# Altium PCB imu.PcbDoc
Units mil, origin at the board's own origin, x right, y up, seen from the top; angles counter-clockwise.
Board outline 1417.32 x 1417.32 mil, 2 copper layers (Top Layer, Bottom Layer); 52 components, 44 nets, 245 pads, 84 vias.
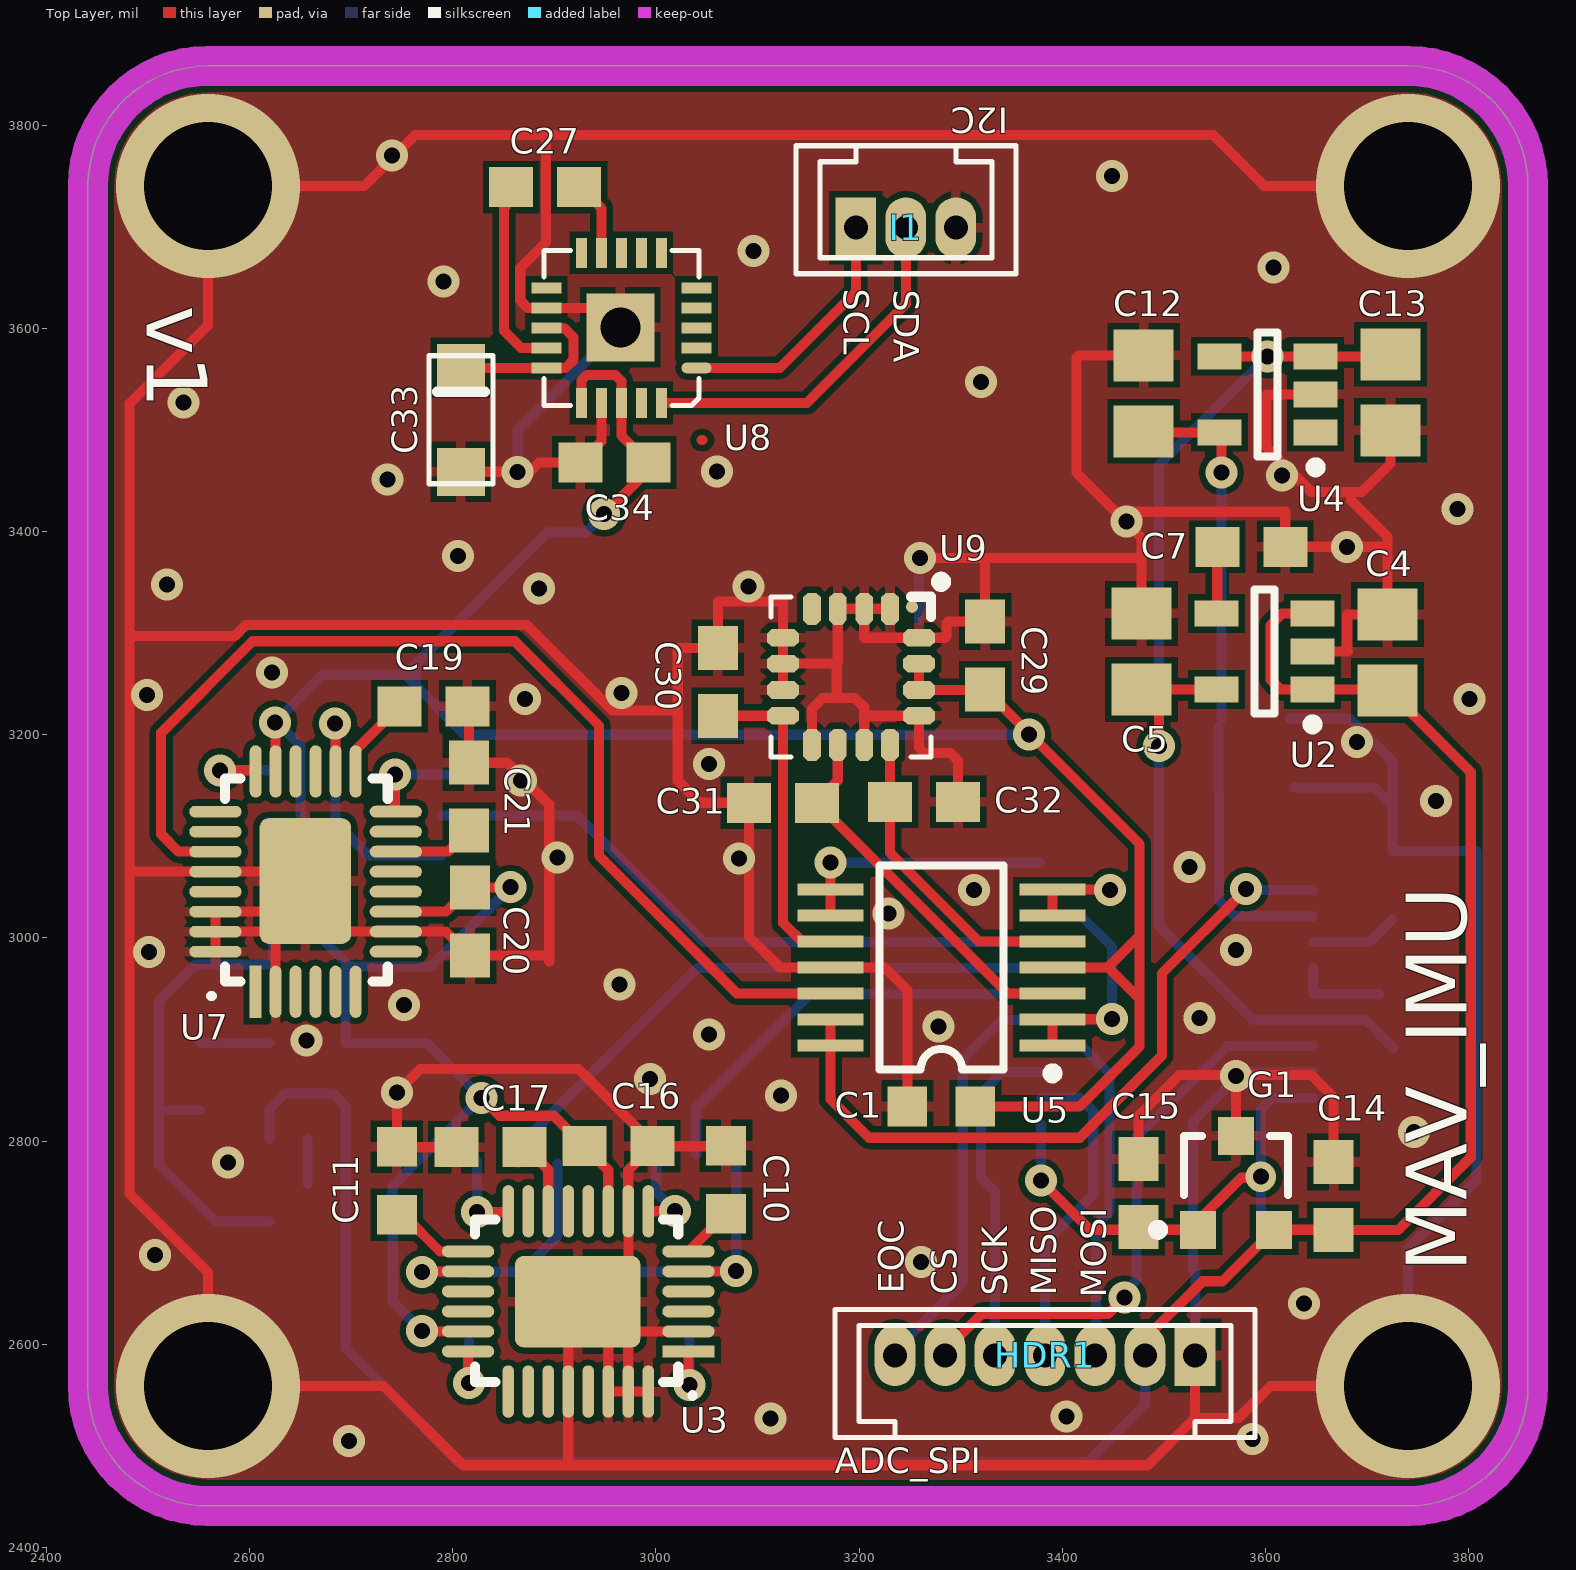
[diagram p0: Top Layer view]
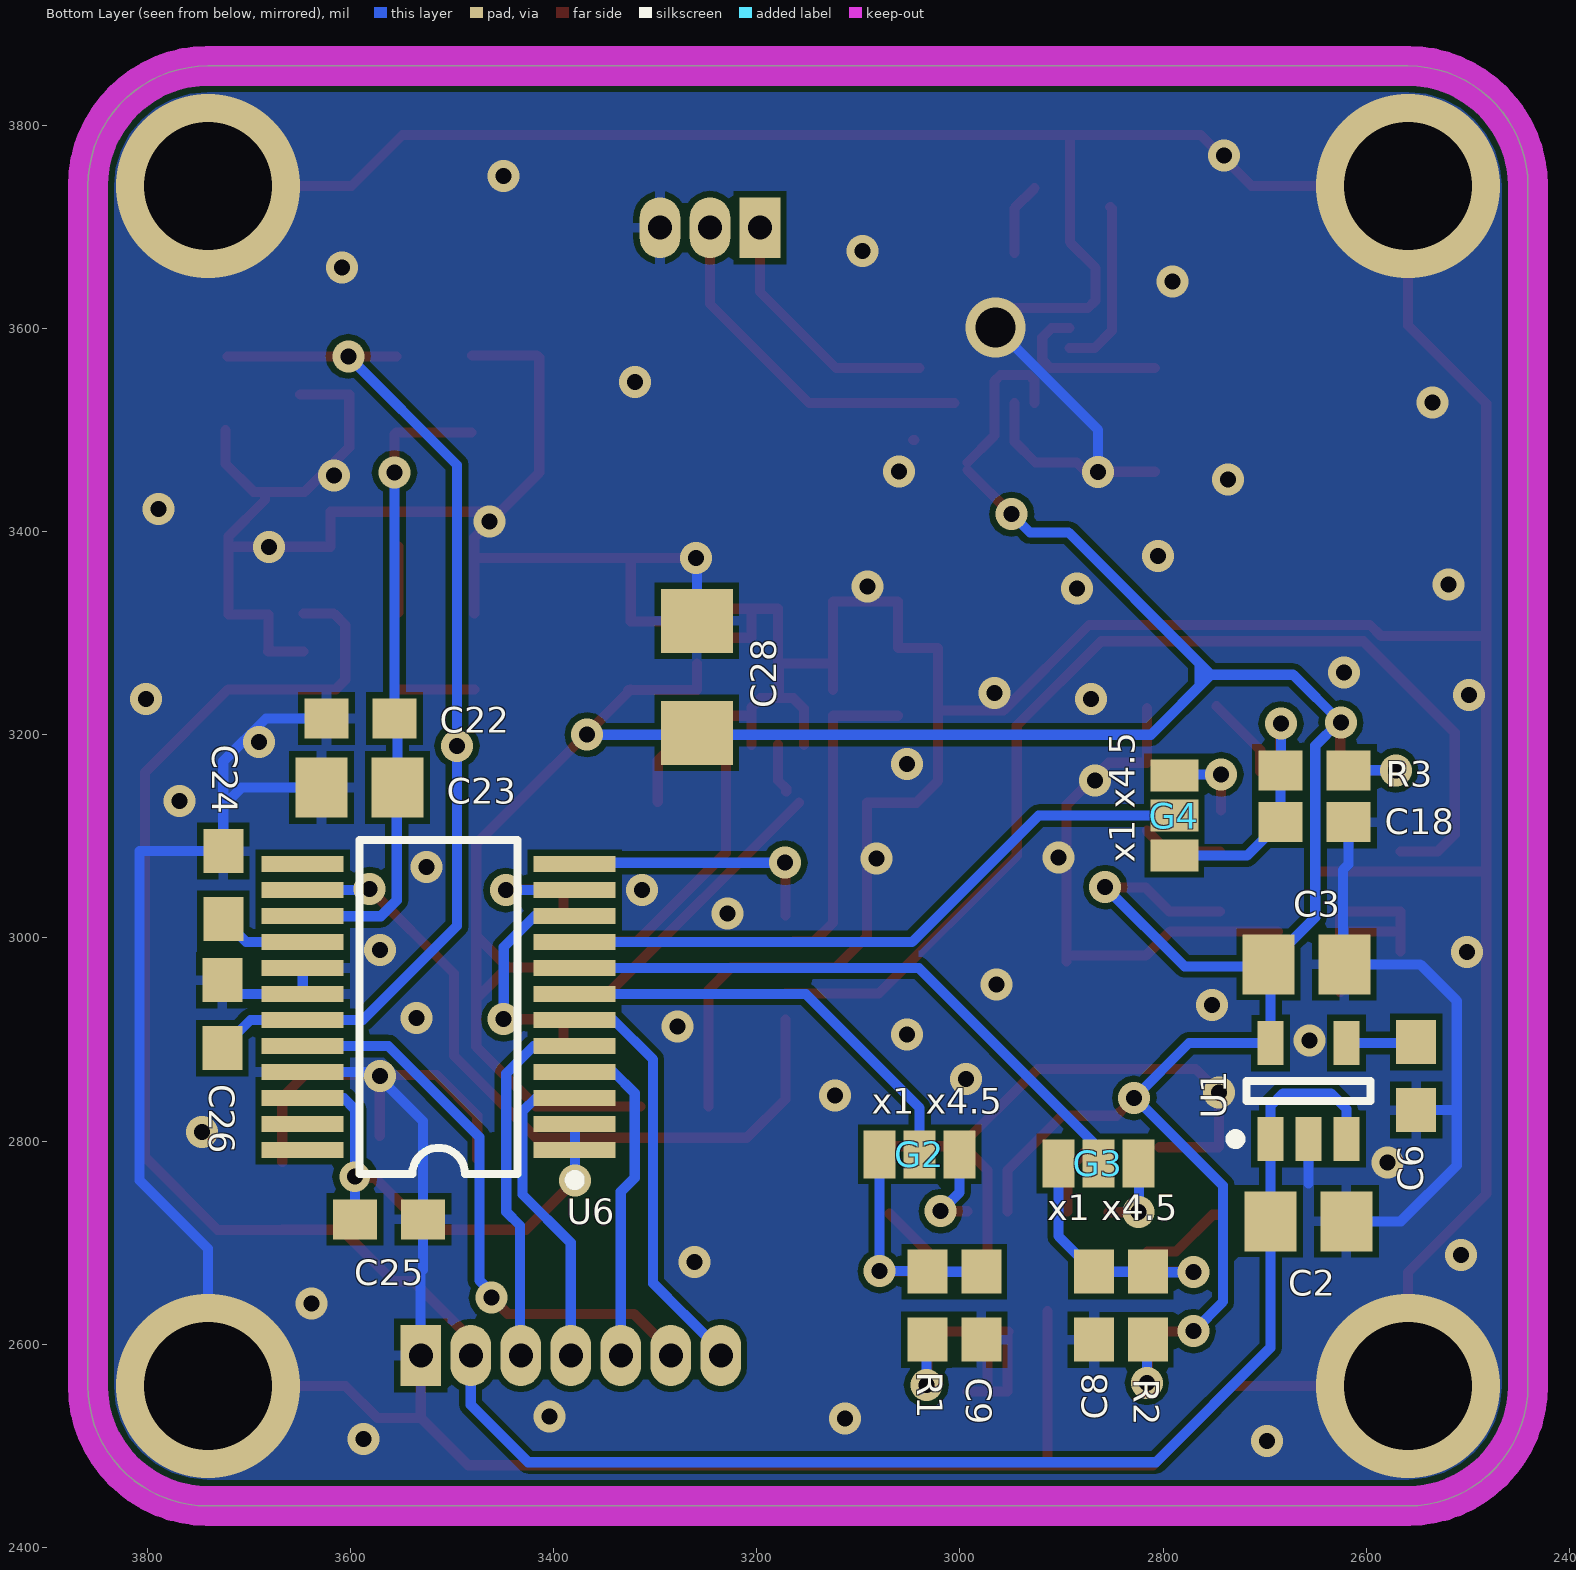
[diagram p1: Bottom Layer view, seen from below]

## Layer stack, top to bottom
Top Layer: signal copper 1.4
Dielectric: dielectric 12.6, FR-4, Dk 4.8
Bottom Layer: signal copper 1.4

## Board outline
2440.94,2559.06 2440.94,3740.16 cw(c2559.06,3740.16) 2559.06,3858.27 3740.16,3858.27 cw(c3740.16,3740.16) 3858.27,3740.16 3858.27,2559.06 cw(c3740.16,2559.06) 3740.16,2440.94 2559.06,2440.94 cw(c2559.06,2559.06)

## Design rules (kind name [scope] priority, off if disabled: settings)
Clearance [All] p1: gap=6
HoleSize [All] p1: absolutevalues=TRUE maxlimit=157.48 minlimit=11.81 maxpercent=80.000 minpercent=20.000
MinimumSolderMaskSliver [All] p1 off: minsoldermaskwidth=10
PolygonConnect PolygonConnect_1 [IsVia] p1: connectstyle=Direct reliefconductorwidth=10 reliefentries=4 polygonreliefangle="90 Angle"
PolygonConnect [All] p2: connectstyle=Relief reliefconductorwidth=10 reliefentries=4 polygonreliefangle="90 Angle"
RoutingVias [All] p1: holewidth=28 width=50 viastyle="Through Hole" minholewidth=11.81 minwidth=23.62 maxholewidth=157.48 maxwidth=236.22
SilkToSilkClearance [All] p1 off: silktosilkclearance=10
SilkscreenOverComponentPads [All] p1 off: minsilkscreentomaskgap=10
SolderMaskExpansion SolderMaskExpansion_1 [IsVia] p1: expansion=-78.74
SolderMaskExpansion [All] p2: expansion=4
TestPointUsage [All] p1: valid=0 allowmultiple=FALSE
Testpoint [All] p1: side=15 testpointundercomponent=TRUE minsize=40 maxsize=100 preferedsize=60 minholesize=0 maxholesize=40 preferedholesize=32 testpointgrid=1 style=1023 order=0123456789
Width [All] p1: maxlimit=10 minlimit=6 preferedwidth=10 minimp=50.000000 maximp=50.000000 favimp=50.000000
20 further rules are at their usual default settings.

## Components (designator, comment, footprint, x,y, rotation, side; value= is the part's Value field where it differs from the comment)
C1 "100nF" 0603#1 3281,2834 r0 top
C2 "0805" 0805 2657,2721 r0 bottom
C3 "0805 10V LowESR" 0805 2659,2974 r0 bottom
C4 "0805" 0805 3720,3281 r270 top
C5 "0805 10V LowESR" 0805 3478,3282 r270 top
C6 "0603" 0603#2 2551,2864 r90 bottom
C7 "0603" 0603#2 3586,3385 r180 top
C8 "100nF" 0603#2 2868,2638 r90 bottom
C9 "100nF" 0603#2 2979,2638 r90 bottom
C10 "220nF" 0603#1 3069,2762 r270 top
C11 "220nF" 0603#1 2745,2761 r270 top
C12 "0805" 0805 3480,3536 r270 top
C13 "0805" 0805 3723,3537 r90 top
C14 "100nF" 0603#2 3667,2746 r270 top
C15 "100nF" 0603#2 3475,2749 r270 top
C16 "100nF" 0603#2 2963,2795 r180 top
C17 "100nF" 0603#2 2837,2794 r0 top
C18 "100nF" 0603#2 2651,3114 r0 bottom
C19 "220nF" 0603#2 2781,3228 r180 top
C20 "100nF" 0603#2 2817,3016 r90 top
C21 "100nF" 0603#2 2816,3139 r270 top
C22 "100nF" 0603#2 3590,3216 r180 bottom
C23 "0805" 0805 3591,3148 r180 bottom
C24 "100nF" 0603#2 3725,3052 r270 bottom
C25 "100nF" 0603#2 3562,2723 r0 bottom
C26 "100nF" 0603#2 3726,2925 r270 bottom
C27 "220nF" 0603#2 2891,3739 r0 top
C28 "1206" 1206 3258.93,3257 r270 bottom
C29 "100nF" 0603#2 3324,3278 r270 top
C30 "100nF" 0603#2 3061,3252 r270 top
C31 "100nF" 0603#2 3125,3133 r0 top
C32 "100nF" 0603#2 3264,3134 r180 top
C33 "4.7uF" T491A 2808,3510 r90 top
C34 "100nF" 0603#2 2959,3468 r180 top
G1 "Dipswitch" SOT23A_CDW 3571,2759 r0 top
G2 "x1 x4.5" 3pin1mmpitch 3079,2787 r180 bottom
G3 "x1 x4.5" 3pin1mmpitch 2903,2778 r180 bottom
G4 "x1 x4.5" 3pin1mmpitch 2789,3081 r90 bottom
HDR1 "ADC_SPI" PICOBLADE_53047-0710 3528,2589 r90 top
I1 "I2C" PICOBLADE_53047-0310 3196,3699 r270 top
R1 "2k" 0603#2 3032,2638 r90 bottom
R2 "2k" 0603#2 2815,2638 r270 bottom
R3 "2k" 0603#2 2651,3165 r180 bottom
U1 "LP2992AIM3.3" MF05A_N 2656.98,2849.28 r90 bottom
U2 "LP2992AIM5-5.0" MF05A_N 3599,3282 r180 top
U3 "IDG500" QFN4x5 3022,2593 r180 top
U4 "LM4132" MF05A_N 3602,3535 r180 top
U5 "AD8534ARU" RU-14 3281,2971 r90 top
U6 "MAX1168" SSOP24 3513,2932 r90 bottom
U7 "ISZ500" QFN4x5 2606,2957 r90 top
U8 "HMC5843" HMC5843 3035,3561 r180 top
U9 "LIS344AL(H)" ST_Lga16 3192,3257 r270 top

## Footprints (in the part's own frame and the unit in brackets; to place one, negate y for a bottom-side part, rotate by r counter-clockwise, add the part's x,y. Pads: shape width x height; smd on the part's side, far side on the other; paste and mask are expansions set on the pad)
3pin1mmpitch [mm]
  rect 0.8x1.2 smd: 1(0,0) 2(1,0) 3(2,0)
0603#1 [mm] "Chip Capacitor; Body 1.6 x 0.8 mm (LxW typ)"
  rect 0.991x1 smd: 1(-0.85,0) 2(0.85,0)
  body extent -1.12,-0.46 1.02,0.46, height 0.6
0603#2 [mm] "Chip Capacitor; Body 1.6 x 0.8 mm (LxW typ)"
  rect 1.1x1 smd: 1(-0.85,0) 2(0.85,0)
  body extent -1.12,-0.46 1.02,0.46, height 0.6
0805 [mm] "Chip Capacitor; Body 2.0 x 1.2 mm (LxW typ)"
  rect 1.3x1.5 smd: 1(-0.95,0) 2(0.95,0)
  body extent -1.3,-0.66 1.32,0.66, height 0.8
1206 [mm] "Chip Capacitor; Body 3.2 x 1.6 mm (LxW typ)"
  rect 1.6x1.8 smd: 1(-1.4,0) 2(1.4,0)
  body extent -1.83,-0.81 1.75,0.81, height 1.1
HMC5843 [mm]
  rect 1.7x1.7 smd: 0(1.778,-1.016)
  oval 0.75x0.27 smd: 1(-0.127,0)
  rect 0.75x0.27 smd: 2(-0.127,-0.5) 3(-0.127,-1) 4(-0.127,-1.5) 5(-0.127,-2) 11(3.627,-2) 12(3.627,-1.5) 13(3.627,-1) 14(3.627,-0.5) 15(3.627,0)
  rect 0.27x0.75 smd: 6(0.75,-2.877) 7(1.25,-2.877) 8(1.75,-2.877) 9(2.25,-2.877) 10(2.75,-2.877) 16(2.75,0.877) 17(2.25,0.877) 18(1.75,0.877) 19(1.25,0.877) 20(0.75,0.877)
  silkscreen extent -0.19,-2.94 3.69,0.94, body extent -0.25,-3 3.75,1, height 1.3
MF05A_N [mm] "SOT23, 5-Leads, Body 2.9x1.6mm, Pitch 0.95mm, Lead Span 2.8mm, IPC Medium Density"
  rect 1.1x0.65 smd: 1(-1.2,0.95) 2(-1.2,0) 3(-1.2,-0.95) 4(1.2,-0.95) 5(1.2,0.95)
  silkscreen extent -1.32,-1.55 0.25,1.95, body extent -0.9,-1.55 0.9,1.55, height 1.22
PICOBLADE_53047-0310 [mil]
  rect 60x40 hole 23.62: 1(0,0.79)
  oval 60x40 hole 23.62: 2(0,50) 3(0,99.21)
  silkscreen extent -81,-58 45,158
PICOBLADE_53047-0710 [mil]
  rect 60x40 hole 23.62: 1(0,-2.64)
  oval 60x40 hole 23.62: 2(0,46.57) 3(0,95.79) 4(0,145) 5(0,194.21) 6(0,243.43) 7(0,292.64)
  silkscreen extent -81,-62 45,352
QFN4x5 [mm] "4x5 mm QFN"
  rect 1.308x0.295 smd: 1(-0.254,0)
  oval 1.308x0.295 smd: 2(-0.254,-0.5) 3(-0.254,-1) 4(-0.254,-1.5) 5(-0.254,-2) 6(-0.254,-2.5) 15(5.254,-2.5) 16(5.254,-2) 17(5.254,-1.5) 18(5.254,-1) 19(5.254,-0.5) 20(5.254,0)
  oval 0.295x1.308 smd: 7(0.75,-3.504) 8(1.25,-3.504) 9(1.75,-3.504) 10(2.25,-3.504) 11(2.75,-3.504) 12(3.25,-3.504) 13(3.75,-3.504) 14(4.25,-3.504)
  oval 0.292x1.308 smd: 21(4.25,1.004) 22(3.75,1.004) 23(3.25,1.004) 24(2.75,1.004) 25(2.25,1.004) 26(1.75,1.004) 27(1.25,1.004) 28(0.75,1.004)
  rrect20% 3.142x2.292 smd: PAD(2.515,-1.245)
  silkscreen extent -0.36,-3.3 5.08,1.12, body extent -0.13,-3.43 5.21,0.89, height 1.15
RU-14 [mm] "Shrink Small Outline, TSSOP; 14 Leads; Body Width 4.4 mm; Pitch 0.65 mm"
  rect 0.3x1.65 smd: 1(-1.95,-2.775) 2(-1.3,-2.775) 3(-0.65,-2.775) 4(0,-2.775) 5(0.65,-2.775) 6(1.3,-2.775) 7(1.95,-2.775) 8(1.95,2.775) 9(1.3,2.775) 10(0.65,2.775) 11(0,2.775) 12(-0.65,2.775) 13(-1.3,2.775) 14(-1.95,2.775)
  silkscreen extent -2.77,-2.9 2.55,1.55, body extent -2.55,-1.55 2.55,1.55, height 1.2
SOT23A_CDW [mm] "SOT-23; 3 Leads; Body 3.0 x 2.5 mm, inc. leads (LxW max)"
  rect 0.9x0.95 smd: 1(-0.95,-1.175) 2(0.95,-1.175) 3(0,1.175)
  silkscreen extent -2.07,-1.3 1.3,1.18, body extent -1.27,-1.46 1.27,1.46, height 1.3
SSOP24 [mm] "SSOP; 24 Leads; Body Width 5.3 mm; Pitch 0.65 mm"
  rect 0.4x2.05 smd: 1(-3.575,-3.4) 2(-2.925,-3.4) 3(-2.275,-3.4) 4(-1.625,-3.4) 5(-0.975,-3.4) 6(-0.325,-3.4) 7(0.325,-3.4) 8(0.975,-3.4) 9(1.625,-3.4) 10(2.275,-3.4) 11(2.925,-3.4) 12(3.575,-3.4) 13(3.575,3.4) 14(2.925,3.4) 15(2.275,3.4) 16(1.625,3.4) 17(0.975,3.4) 18(0.325,3.4) 19(-0.325,3.4) 20(-0.975,3.4) 21(-1.625,3.4) 22(-2.275,3.4) 23(-2.925,3.4) 24(-3.575,3.4)
  silkscreen extent -4.45,-3.52 4.18,1.98
ST_Lga16 [mm] "ST LIS344AL(H) LGA 16"
  oct 0.8x0.44 smd mask+0.112: 1(-1.7,0.975) 2(-1.7,0.33) 3(-1.7,-0.33) 4(-1.7,-0.975) 9(1.7,-0.975) 10(1.7,-0.33) 11(1.7,0.33) 12(1.7,0.975)
  oct 0.44x0.8 smd mask+0.112: 5(-0.975,-1.7) 6(-0.33,-1.7) 7(0.33,-1.7) 8(0.975,-1.7) 13(0.975,1.7) 14(0.33,1.7) 15(-0.33,1.7) 16(-0.975,1.7)
  round 0.3 smd mask+0.112: nc(-1.75,1.525)
  silkscreen extent -2.5,-2 2,2.38
T491A [mm]
  rect 1.2x1.2 smd: 1(1.3,0) 2(-1.3,0)
  silkscreen extent -1.6,-0.8 1.6,0.8, body extent -1.66,-0.86 1.66,0.86, height 1.8

## Part data
C1 C8 C9 C10 C11 C14 C15 C16 C17 C18 C19 C20 C21 C22 C23 C24 C25 C26 C27 C28 C29 C30 C31 C32 C34: library part CAP
C2 C3 C4 C5 C6 C7 C12 C13: library part Cap, "Capacitor"
C33: library part ELECTRO1
G1 G2 G3 G4 I1: library part "Header 3", "Header, 3-Pin"
HDR1: library part "Header 7", "Header, 7-Pin"
R1 R2 R3: library part RES1
U1: library part LP2992AIM5-5.0, "Micropower 250 mA Low-Noise Ultra Low-Dropout Regulator in SOT-23 and LLP Packages"
U2: "Micropower 250 mA Low-Noise Ultra Low-Dropout Regulator in SOT-23 and LLP Packages"
U3: "INVENSENSE Integrated Dual Axis Gyroscope"
U4: library part LP2981AIM5-2.5, "Micropower 100 mA Ultra Low-Dropout Regulator in SOT-23 and micro SMD Packages"
U5: "Low Cost, 250 mA Output Single-Supply Amplifier"
U6: "ADC"
U7: "INVENSENSE SingleZ Gyroscope"
U8: "Honeywell 3 Axis Compass I2C"
U9: library part LIS344AL

## Via types
v1: diameter 31.5, hole 15.75, Top Layer to Bottom Layer, 78 vias
v2: diameter 181.1, hole 125.98, Top Layer to Bottom Layer, 4 vias
v3: diameter 59.06, hole 39.37, Top Layer to Bottom Layer, 1 vias
v4: diameter 30, hole 15.75, Top Layer to Bottom Layer, 1 vias

## Nets (pads, with @x,y where several pads share a name; then routed paths per layer and width w, separated by ;. In a path a pad name is that pad's centre, name@x,y a point inside that pad or via, vN(x,y) a via of type N, cw(c..) or ccw(c..) an arc to the next point about the centre after c; other vN are vias at no path point)
+3.3V: C15.2 C25.2 G1.1 U6.1 U6.2 U6.22 | length 475.9
  Top Layer w10: v1(3379,2761) 3427.26,2712.74 3524.74,2712.74 3576,2764 v4@3595.5,2764
  Bottom Layer w10: v1(3379,2761) U6.2@3379,2816.7 ; C25.2@3595.5,2724.96 3595.5,2831.5 3606.43,2842.43 U6.22
  other v4: 3595.5,2765
+6.5V: C2.2 C4.2 C14.2 G1.2 HDR1.2 U1.1 U1.3 U2.1 U2.3 | length 2383.9
  Top Layer w10: HDR1.2 3481.43,2605.34 3538.08,2662 3557.66,2662 G1.2 C14.2@3666.8,2712.74 ; U2.3 3616.4,3319.4 3605,3308 3605,3254 3614.4,3244.6 U2.1 3720.4,3244.6 3802,3163 3802,2784 3730.54,2712.54 C14.2
  Bottom Layer w10: U1.3 2619.57,2831.57 2635,2847 2682,2847 2694.38,2834.62 U1.1 C2.2 2694.4,2596.6 2807,2484 3425,2484 3481.43,2540.43 HDR1.2
A+3.3V: C1.2 C3.2 C16.2 C20.2 C28.2 C29.2 C34.1 U1.5 U3.9 U3.19 U5.4 U7.9 U7.19 U8.16 U8.18 U9.14 U9.15 | length 3508.5
  Top Layer w10: U7.19 v1@2625.68,3211.32 ; U7.9 2793.43,3025.9 C20.2 v1@2856.46,3049.46 ; v1@2770.32,2612.68 U3.19 ; v1@2837,2834 2846,2825 2899.54,2825 C16.2 2953.1,2771.43 U3.9 ; U8.16 2926.73,3548.73 2932,3554 2960,3554 2966.1,3547.9 U8.18 2966.1,3494.36 C34.1 ; v1(2949,3417) C34.1@2992.46,3460.46 ; U9.15 U9.14 C29.2@3326.53,3244.01 ; C1.2 3417,2834 3476,2893 3476,2940 3445,2971 ; C29.2 3476,3092.54 3476,2926 ; U5.4 3445,2971 ; 3476,3002 3445,2971
  Bottom Layer w10: C3.2 2650.19,3020.21 2650.19,3189.24 2627.43,3212 v1(2625,3212) 2672,3259 2753,3259 ; 2764,3248 2764,3270 ; v1(2770,2613) 2741,2642 2741,2756 2823,2838 v1@2829,2838 ; v1(2828.55,2842.45) 2774.48,2896.52 U1.5 2694.38,2971.98 2778.98,2971.98 v1(2857,3050) ; v1(2949,3417) 2931,3399 2893,3399 2764,3270 ; v1(3367,3200) 2812,3200 2753,3259 ; 2753,3259 2764,3270
A+5V: C5.2 C13.2 C26.2 U2.5 U4.3 U4.4 U6.19 | length 1164.2
  Top Layer w10: C5.2 U2.5 ; v1(3495,3189) C5.2@3495,3227.6 ; U4.4 C13.2@3721,3572.4
  Bottom Layer w10: v1(3602,3572.4) 3495,3465.4 3495,3012 3587.8,2919.2 U6.19 3698.33,2919.2 C26.2
ACCX: U5.6 U5.7 U6.11 | length 150.6
  Top Layer w10: U5.6 U5.7 3446.23,3047.77 v1(3447,3047)
  Bottom Layer w10: U6.11 3446.84,3047.16 v1(3447,3047)
ACCX100K: C32.2 U5.5 U9.12 | length 302.3
  Top Layer w10: U9.12 3230.39,3134.85 3230.39,3083.71 3317.5,2996.59 U5.5
ACCY: U5.1 U5.2 U6.10 | length 237.7
  Top Layer w10: U5.1 U5.2 ; U5.2@3390.43,2920 v1(3449,2920)
  Bottom Layer w10: U6.10 3418.43,3021.57 3449,2991 v1(3449,2920)
ACCY100K: C31.2 U5.3 U9.10 | length 358.9
  Top Layer w10: C31.2 3346.06,2945.41 U5.3 ; C31.2@3171,3144 3171,3147 3179.01,3155.01 U9.10
ACCZ: U5.8 U5.9 U6.12 | length 270.2
  Top Layer w10: U5.9 3171.75,3035 ; U5.8 3171.75,3035 ; v1@3171.75,3073.75 3171.75,3035
  Bottom Layer w10: v1(3172,3074) U6.12@3377.89,3074
ACCZ100K: C30.2 U5.10 U9.8 | length 314
  Top Layer w10: C30.2@3061.08,3218.61 U9.8 3125,3218.54 3125,3015 3128.27,3011.73 ; 3128.27,3011.72 3143.4,2996.59 U5.10@3163.75,2996.59
AREF: C12.2 C22.2 C23.2 U4.5 U6.15 | length 617.6
  Top Layer w10: C12.2@3481,3497.6 U4.5 ; v1(3556.54,3458) U4.5@3556.54,3495.82
  Bottom Layer w10: C23.2 C22.2@3553.6,3207.06 ; C23.2@3554.25,3142.65 3554.25,3036.92 3569.92,3021.25 3646.54,3021.25 U6.15 ; C22.2 v1(3556.54,3458)
C1+: C33.1 U8.13 U8.15 | length 166.8
  Top Layer w10: C33.1@2808.18,3561 U8.15 2911,3561 2919,3569 2919,3591 2909.63,3600.37 U8.13
CPOUT: C17.2 U3.12 | length 65.1
  Top Layer w10: C17.2@2877,2789 2894.05,2771.95 U3.12
CPOUTZ: C21.2 U7.12 | length 80.6
  Top Layer w10: U7.12 2795.42,3084.95 C21.2
CS: HDR1.6 U6.20 | length 576.7
  Top Layer w10: HDR1.6 3284.57,2593.63 3320.95,2630 3445.05,2630 v1(3461.05,2646)
  Bottom Layer w10: v1(3461.05,2646) 3461.05,2651.05 3473,2663 3473,2804 3562.61,2893.61 U6.20
EOC: HDR1.7 U6.6 | length 412.3
  Bottom Layer w10: HDR1.7 3235.36,2593.63 3271.73,2630 3272,2630 3302,2660 3302,2880.26 3340.95,2919.2 U6.6
GND: C1.1 C2.1 C3.1 C4.1 C5.1 C6.1 C7.1 C8.1 C9.1 C10.1 C11.1 C12.1 C13.1 C14.1 C15.1 C16.1 C17.1 C18.1 C19.1 C20.1 C21.1 C22.1 C23.1 C24.1 C25.1 C26.1 C28.1 C29.1 C30.1 C31.1 C32.1 C33.2 C34.2 G1.3 HDR1.1 I1.3 U1.2 U2.2 U3.2 U3.8 U3.24 U3.26 U3.27 U3.28 U3.PAD U4.2 U5.11 U6.17 U6.18 U6.21 U7.2 U7.8 U7.24 U7.26 U7.27 U7.28 U7.PAD U8.0 U8.12 U8.17 U9.1 U9.2 U9.3 U9.5 U9.6 U9.7 U9.9 U9.11 U9.13 U9.16 | length 12385.2
  Top Layer w10: 2482,3271 2482,3258 ; 2484.27,3065.27 U7.24 U7.PAD@2645.73,3065.27 ; U7.28 U7.26 U7.PAD@2624.9,3025.9 ; U7.27 U7.PAD@2625.68,3006.21 ; U7.2 U7.PAD@2625.68,3026.68 ; U7.PAD@2687,3006.21 U7.8 2793.32,3006.21 C20.1 2889.46,2982.54 ; C11.1 v1(2745,2848) 2768,2871 2923.54,2871 2933.79,2860.75 2996.46,2798.07 C16.1 ; C11.1@2745.46,2794 C17.1 ; C33.2 2875.82,3458.82 2885,3468 C34.2 2946.42,3488.88 U8.17 ; C19.1@2816,3226.46 C21.1 2853.54,3172.46 2895,3131 2895,2977 ; 2891.81,3788.5 2891.81,3684.81 2866.44,3659.44 2866.44,3627.56 2873.95,3620.05 U8.12 U8.0@2945.95,3620.05 ; 2913.73,2481.73 U3.24 U3.PAD@2913.73,2632.73 ; U3.PAD@2952.32,2612.68 U3.2 ; U3.PAD@2953.1,2611.9 U3.26 U3.28 ; U3.27 U3.PAD@2972.79,2612.68 ; U3.PAD@2973,2674 2973,2730.74 U3.8 2972.79,2771.32 C16.1 ; 3021.46,3224 2957,3224 2873,3308 2596.37,3308 2585.37,3297 2482,3297 ; C10.1@3068.54,2795 C16.1 ; U9.7 U9.5 3125,3295.46 3125,3331 3061,3331 C30.1 3021.46,3285.46 3021.46,3154.54 3043,3133 C31.1 3091.54,3001.46 3122,2971 U5.11 3225,2971 3247.54,2948.46 C1.1 ; U9.6 3178.01,3269.99 ; U9.9 3153.61,3225.61 3164,3236 3196,3236 3204.99,3227.01 U9.11 ; 3178.01,3236.99 3178.01,3269.99 ; 3204.99,3295.99 U9.2 ; 3205.61,3218.61 U9.13 3258.93,3187.07 3264,3182 3290,3182 3297.46,3174.54 C32.1 ; 3205.6,3295.39 U9.16 3284.61,3295.39 3286,3296.77 3286,3310 3287.46,3311.46 C29.1 3324,3374 ; U9.1 U9.3 3179.01,3270.99 3178.01,3269.99 ; v1(3260,3374) 3324,3374 ; v1@3453,3419 3453.54,3419.54 3619.46,3419.54 C7.1 3719,3385 ; C15.1 3475,2825 3515,2865 3645,2865 3667,2843 C14.1 ; 3476,3374 3324,3374 ; C5.1 3478,3394 3414,3458 3414,3571 3416.4,3573.4 C12.1 ; HDR1.1 3530.64,2527.64 ; G1.3 v1(3571,2864) ; U2.2 3681,3282 ; U4.2 3601,3535 3601,3483 3645,3439 3684,3439 ; 3679,3284.2 3678.9,3284.1 3681,3282 ; C13.1 3723,3467 3695,3439 3684,3439 ; v2(3740.16,2559.06) 3605.06,2559.06 3573.64,2527.64 3530.64,2527.64 ; v2(3740.16,3740.16) 3598.84,3740.16 3548.68,3790.32 2763,3790.32 2712.84,3740.16 v2(2559.06,3740.16) 2559.06,3603.06 2482,3526 2482,3297 ; 2482,3258 2482,2748 2559.06,2670.94 v2(2559.06,2559.06) 2731.94,2559.06 2810,2481 3484,2481 3530.64,2527.64 ; 2482,3258 2482,3297 ; 3681,3282 3680.4,3282.6 3680.4,3318.4 C4.1 3720,3395 3684,3431 3684,3439
  Bottom Layer w10: 2512.46,2830.54 C6.1 ; C18.1 2617.54,3072.46 2623,3067 2623,2975.4 C3.1 2547,2974 2511,2938 2511,2776 2566,2721 C2.1 ; 2656.98,2758.38 U1.2 ; v1(2864,3458.82) 2864,3500 v3(2965,3601) ; C28.1 v1@3258.93,3375.07 ; HDR1.1 3531,2589.36 3531,2671 3528.54,2673.46 C25.1 3528.54,2819.54 3577.02,2868.02 U6.21 ; C22.1 3683,3216 3725,3174 3725,3130 ; C23.1 3707,3148 3725,3130 ; U6.17 U6.18 C26.1@3712.33,2944.8 ; v2(3740.16,2559.06) 3740.16,2694.16 3807.54,2761.54 3807.54,3085.46 C24.1 3725,3130
  other v1: 2698,2505 3587,2507 3113,2527 3404,2529 3638,2640 3261,2681 2507,2688 2579,2779 3746,2809 3123,2845 2994,2861 2656,2899 3052,2905 3278,2913 3535,2921 2752,2934 2964,2954 2501,2986 3571,2988 3229,3024 3313,3047 3525,3070 3082,3078 2903,3079 3768,3135 2867,3155 3052,3171 3690,3193 2871,3235 3801,3235 2499,3239 2966,3241 2622,3261 2885,3344 3091,3346 2519,3348 2805,3376 3680,3385 3463,3410 3789,3422 2736,3451 3616,3455 3060,3459 2535,3527 3320,3547 2791,3646 3608,3660 3096,3676 3449,3750 2740,3770
GYROX: G2.3 U3.7 | length 90.2
  Top Layer w10: U3.7 v1(3019,2731)
  Bottom Layer w10: G2.3 3000.26,2749.74 v1(3019,2731)
GYROX500: C9.2 G2.1 R1.2 U3.5 | length 248.5
  Top Layer w10: U3.5 v1@3066,2671.74
  Bottom Layer w10: C9.2 R1.2 ; R1.2@3032.54,2672 v1(3079,2672) G2.1
GYROY: G3.3 U3.14 | length 80.5
  Top Layer w10: v1(2824,2730) U3.14@2853.72,2730
  Bottom Layer w10: v1@2823.74,2730.26 G3.3@2823.74,2781
GYROY500: C8.2 G3.1 R2.1 U3.16 | length 263
  Top Layer w10: v1@2770.74,2671.74 U3.16
  Bottom Layer w10: v1(2770,2671) R2.1@2814.54,2671 ; R2.1 C8.2 2903,2706.46 G3.1
GYROZ: G4.3 U7.14 | length 86.5
  Top Layer w10: U7.14@2743,3125.28 v1(2743,3161)
  Bottom Layer w10: v1(2743,3161) G4.3@2793.74,3161
GYROZ500: C18.2 G4.1 R3.1 U7.16 | length 261.1
  Top Layer w10: U7.16 v1@2684.74,3210.26
  Bottom Layer w10: R3.1@2684,3165.46 v1(2684,3211) ; R3.1 C18.2 2717.46,3081 G4.1
MISO: HDR1.4 U6.3 | length 317.2
  Bottom Layer w10: U6.3 3379.71,2843 3416.77,2843 3430.5,2829.27 3430.5,2747.5 3383,2700 HDR1.4
MOSI: HDR1.3 U6.5 | length 362
  Bottom Layer w10: U6.5 3419.39,2893.61 3446.5,2866.5 3446.5,2730.5 3433,2717 3433,2589.79 HDR1.3
NetC6_2: C6.2 U1.4 | length 67.6
  Bottom Layer w10: C6.2@2551.95,2896.52 U1.4
NetC7_2: C7.2 U2.4 | length 64.8
  Top Layer w10: U2.4@3552.54,3320.18 C7.2
NetC27_1: C27.1 U8.14 | length 171.3
  Top Layer w10: C27.1@2852,3719.46 2850.44,3717.91 2850.44,3597.56 2867.32,3580.68 U8.14
NetC27_2: C27.2 U8.9 | length 72
  Top Layer w10: C27.2@2926.46,3738 2946.42,3718.05 U8.9
PTATS12K: U5.12 U7.23 | length 1075.1
  Top Layer w10: U7.23 2530.05,3084.95 2513,3102 2513,3202 2603,3292 2861,3292 2944,3209 2944,3081 3079.59,2945.41 U5.12
RATEX: G2.2 U6.7 | length 431.6
  Bottom Layer w10: G2.2 3039.63,2832.63 3151.8,2944.8 U6.7
RATEY: G3.2 U6.8 | length 604.3
  Bottom Layer w10: G3.2 2863.63,2793.56 3040.46,2970.39 U6.8
RATEZ: G4.2 U6.9 | length 641.7
  Bottom Layer w10: G4.2 2835.63,3120.37 2922.63,3120.37 3047.02,2995.98 U6.9
REFCAP: C24.2 U6.16 | length 87.5
  Bottom Layer w10: U6.16 3702.44,2995.98 C24.2
SCK: HDR1.5 U6.4 | length 331.6
  Bottom Layer w10: HDR1.5 3333.79,2750.21 3320,2764 3320,2847.08 3340.95,2868.02 U6.4
SCL: I1.1 U8.1 | length 251
  Top Layer w10: U8.1 3122,3561 3196.79,3635.79 I1.1
SDA: I1.2 U8.20 | length 355.9
  Top Layer w10: U8.20 3148.47,3526.47 3246,3624 I1.2
TEMP: U5.13 U5.14 U6.14 | length 710
  Top Layer w10: U5.13 3171.75,2841.25 3209.69,2803.31 3417.31,2803.31 3498,2884 3498,2965 v1(3581,3048)
  Bottom Layer w10: v1@3589.16,3047.16 U6.14
XAGC: C10.2 U3.6 | length 52.3
  Top Layer w10: U3.6@3032,2691.54 C10.2
XOUT: R1.1 U3.1 | length 75.5
  Top Layer w10: v1@3032,2561 U3.1
  Bottom Layer w10: v1(3033,2560) R1.1@3033,2603.54
YAGC: C11.2 U3.15 | length 85.1
  Top Layer w10: C11.2 2751.29,2727.54 2787.4,2691.43 U3.15
YOUT: R2.2 U3.20 | length 71.7
  Top Layer w10: v1@2815.15,2562.85 U3.20
  Bottom Layer w10: v1(2816,2562) R2.2@2816,2603.54
ZAGC: C19.2 U7.15 | length 82
  Top Layer w10: U7.15 2704.43,3184.89 C19.2
ZOUT: R3.2 U7.20 | length 80.4
  Top Layer w10: v1(2571,3165) U7.20@2604.85,3165
  Bottom Layer w10: v1(2571,3165) R3.2
pads on no net: U3.3 U3.4 U3.10 U3.11 U3.13 U3.17 U3.18 U3.21 U3.22 U3.23 U3.25 U4.1 U6.13 U6.23 U6.24 U7.1 U7.3 U7.4 U7.5 U7.6 U7.7 U7.10 U7.11 U7.13 U7.17 U7.18 U7.21 U7.22 U7.25 U8.2 U8.3 U8.4 U8.5 U8.6 U8.7 U8.8 U8.10 U8.11 U8.19 U9.4 U9.nc
copper on no net: | length 1
  Top Layer w10: 3045,3490 3046,3490

## Polygon pours and split planes (outlines as drawn)
GND on Top Layer "Keep-Out Layer-No Net" (solid, pour order 1000): 2440.94,2559.06 2440.94,3740.16 cw(c2559.06,3740.16) 2559.06,3858.27 3740.16,3858.27 cw(c3740.16,3740.16) 3858.27,3740.16 3858.27,2559.06 cw(c3740.16,2559.06) 3740.16,2440.94 2559.06,2440.94 cw(c2559.06,2559.06)
GND on Bottom Layer "Keep-Out Layer-No Net" (solid, pour order 1001): 2432.94,2565.06 2432.94,3746.16 cw(c2551.06,3746.16) 2551.06,3864.27 3732.16,3864.27 cw(c3732.16,3746.16) 3850.27,3746.16 3850.27,2565.06 cw(c3732.16,2565.06) 3732.16,2446.94 2551.06,2446.94 cw(c2551.06,2565.06)

## Keep-outs
Keep-Out Layer:
  the board outline again, w39.37

## Silkscreen, mask and mechanical layers (free items; w line width, h text height)
Top Overlay:
  text "SCL" at 3185,3639 h25 r270
  text "SDA" at 3234,3638 h25 r270
  text "v1" at 2499,3622 h60 r270
  text "MAV_IMU" at 3798,2671 h60 r90
  text "EOC" at 3244,2650 h25 r90
  text "CS" at 3296,2649 h25 r90
  text "SCK" at 3346,2648 h25 r90
  text "MISO" at 3394,2648 h25 r90
  text "MOSI" at 3443,2646 h25 r90